# EAGLE board L3DCube_16x16_Base_Rev3 (EAGLE 7.2.0), part 1 of 2
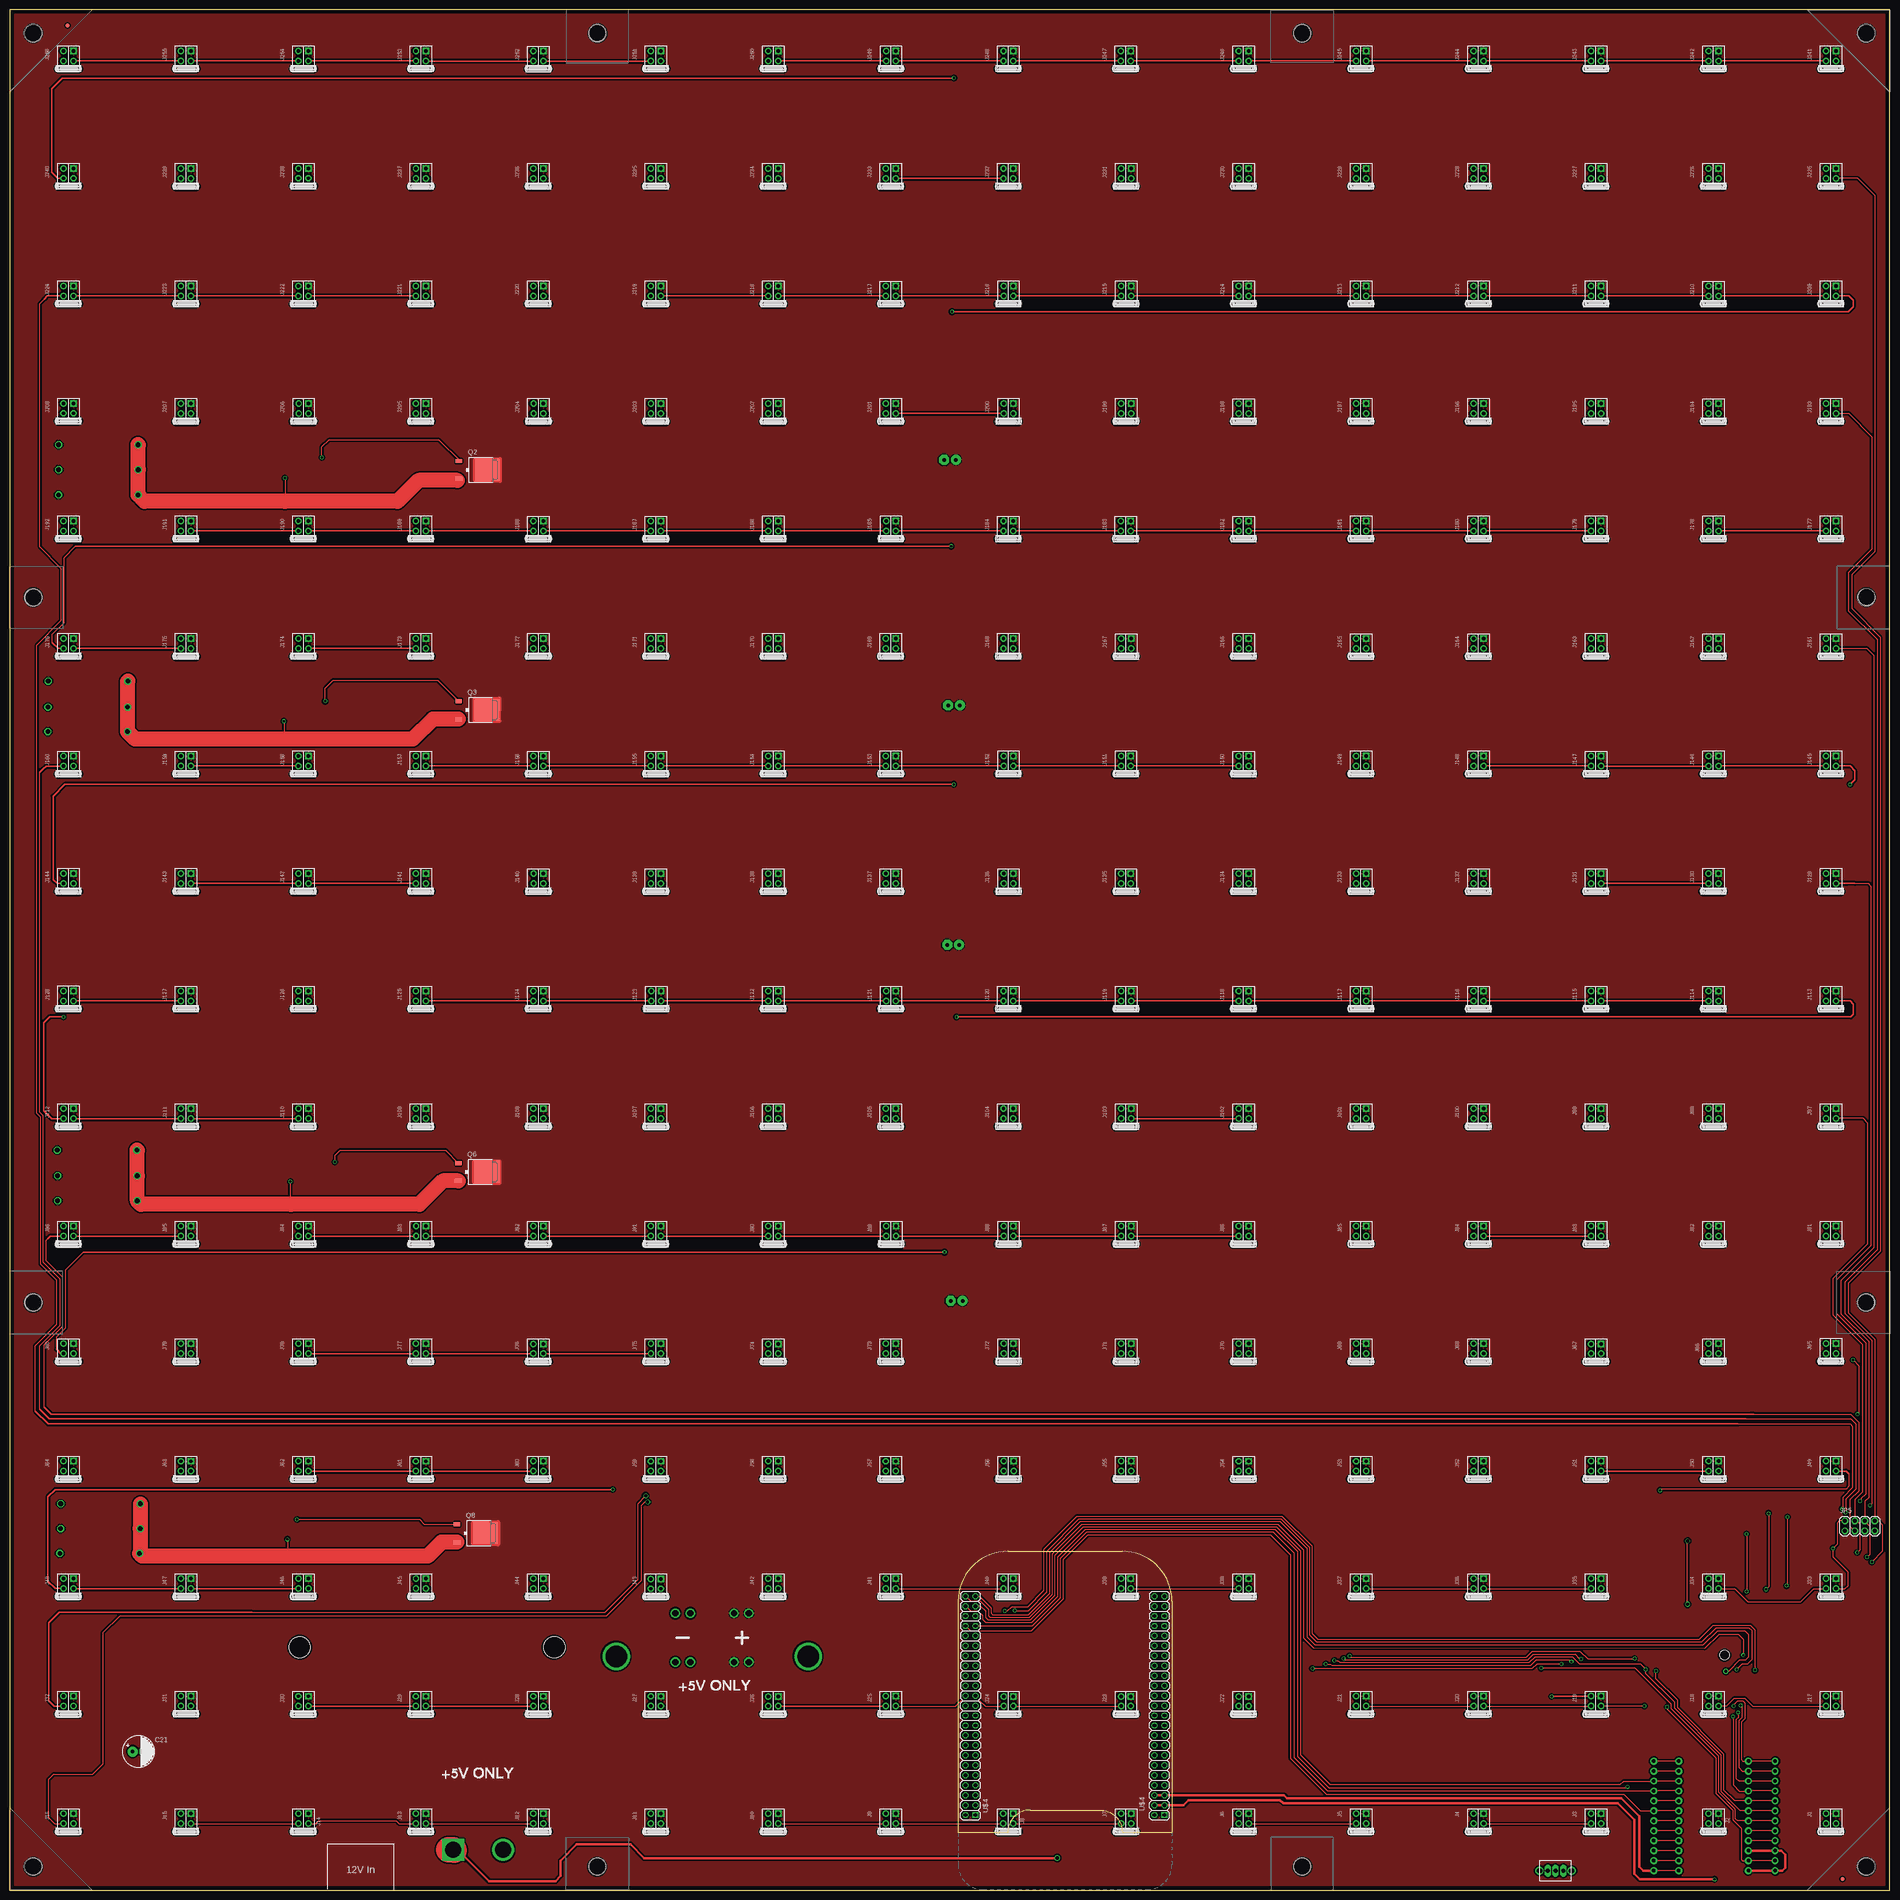
[diagram p0: board, top side]
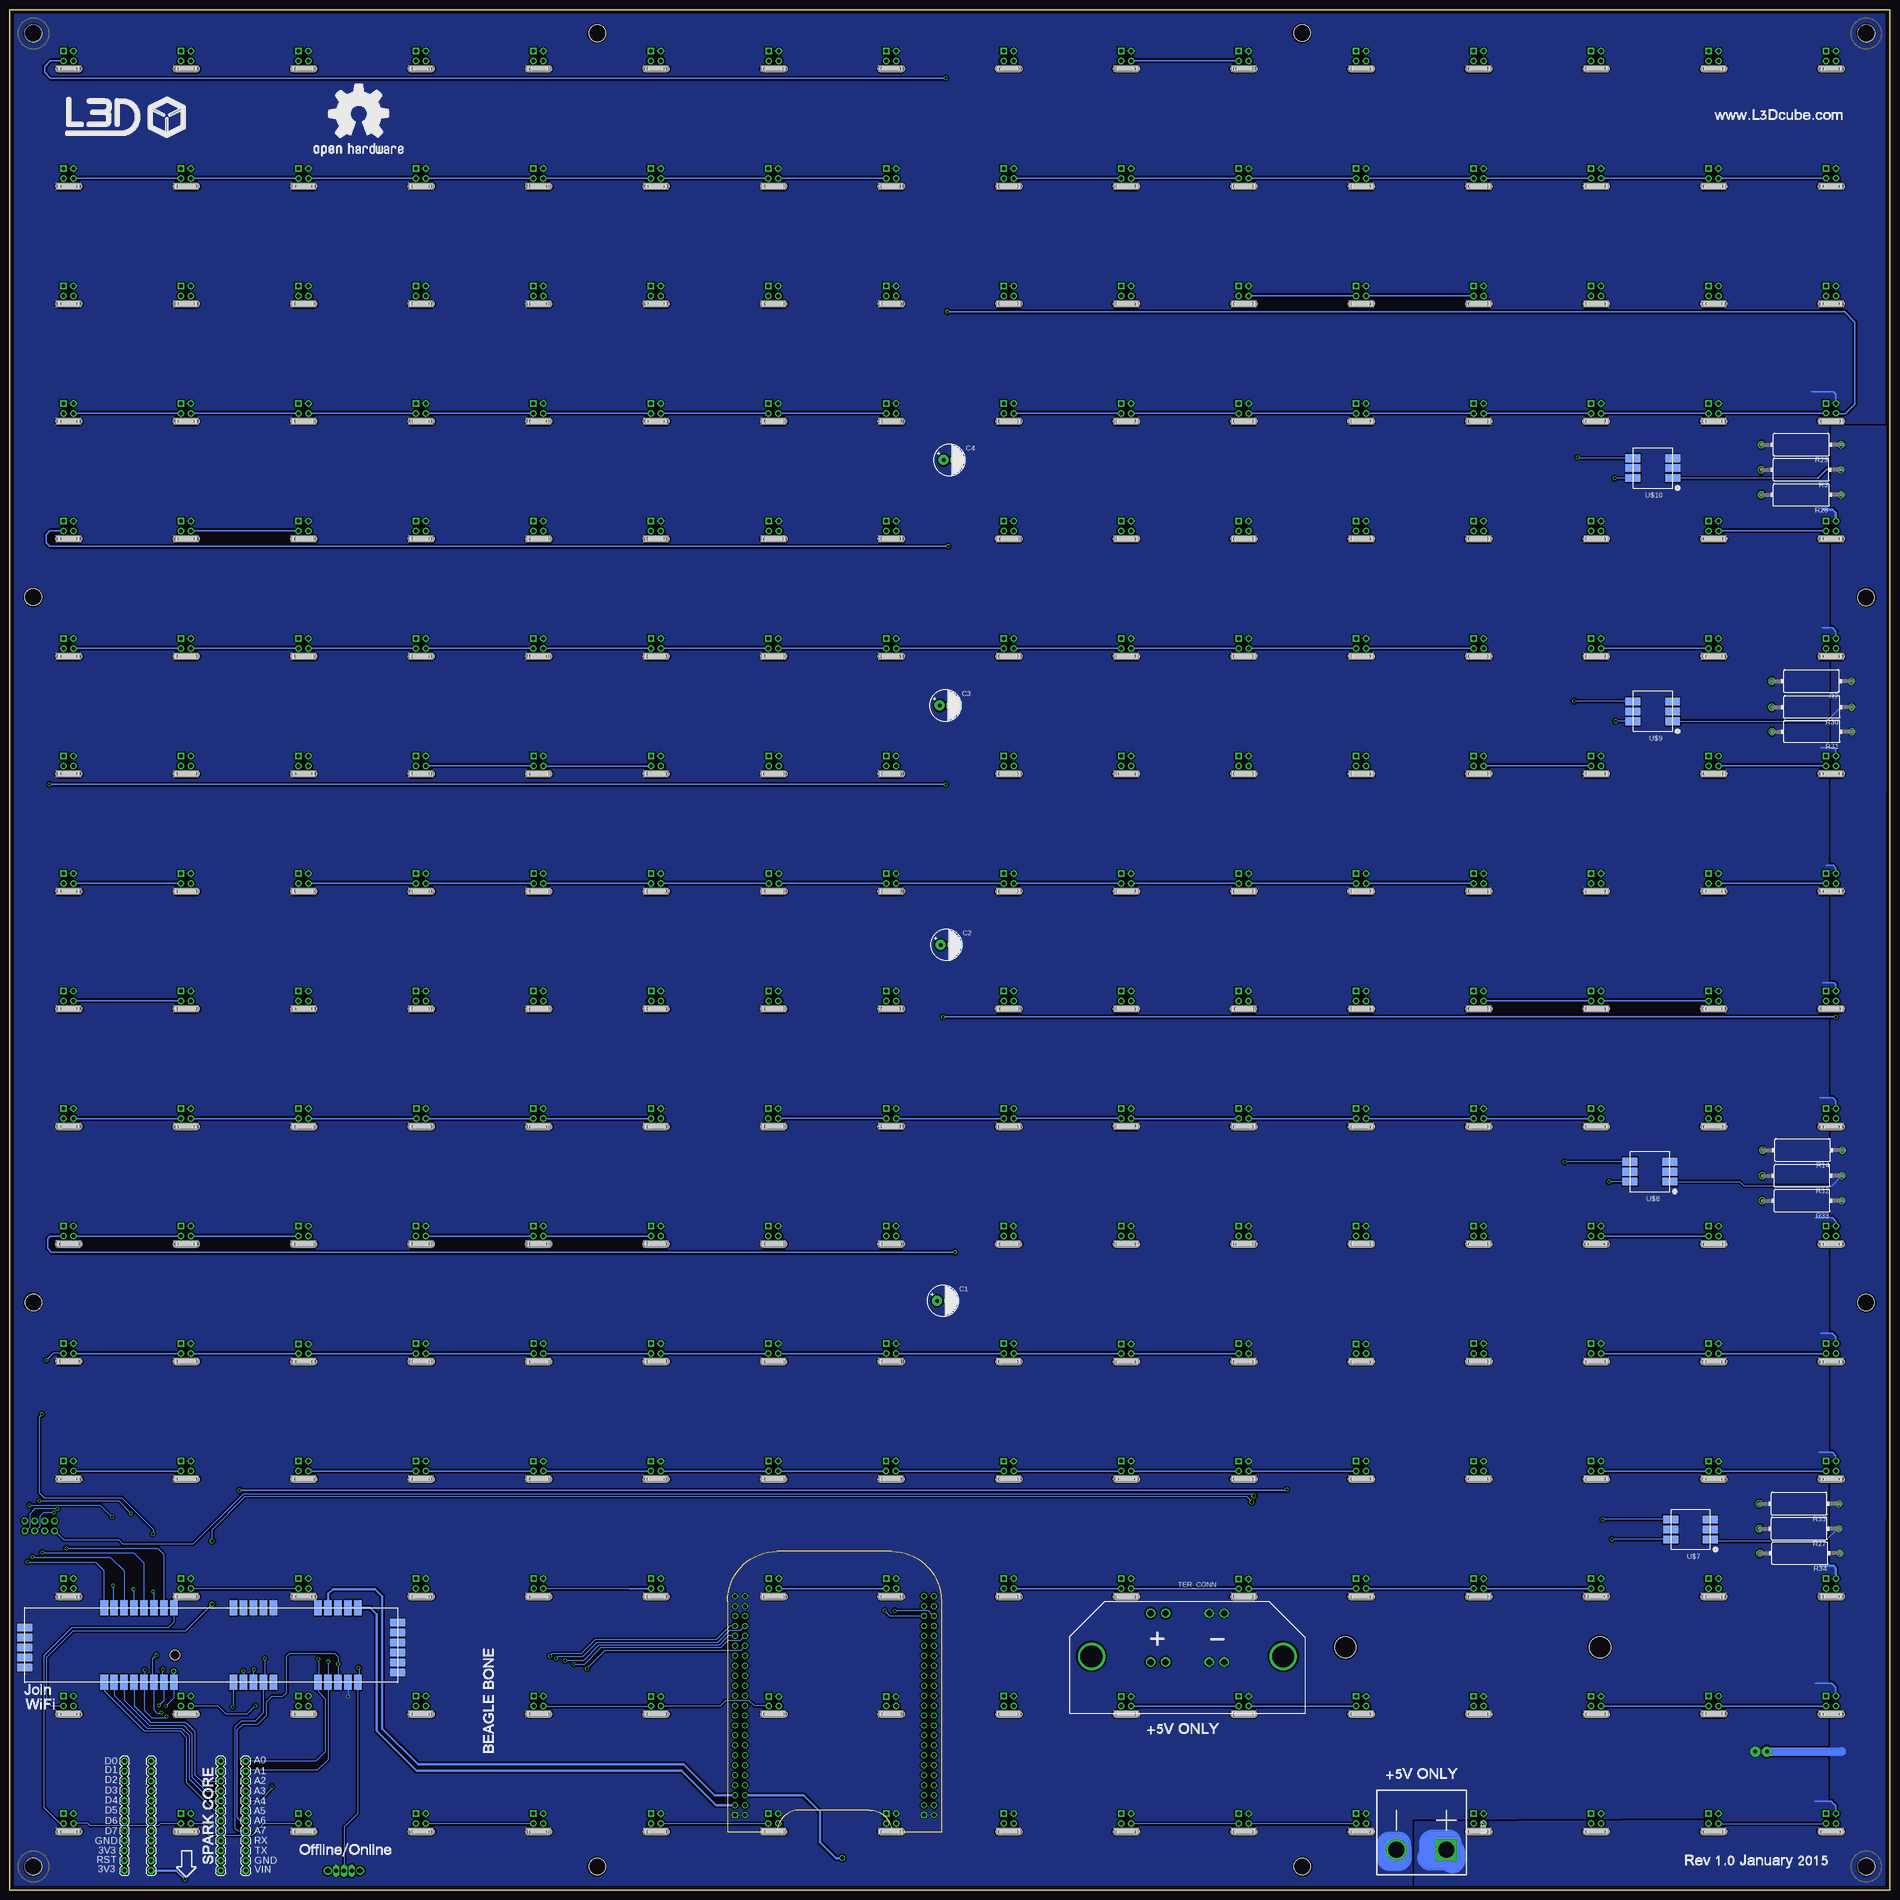
[diagram p1: board, bottom side, seen from below]

Size 480.01 x 479.98 mm. Coordinates in mm from the lower left corner, seen from the top.
Outline: 480.01,479.98 0,479.98 0,0 480.01,0 480.01,479.98
Copper layers (1*16): Top 0.035mm / dielectric 0.5mm / Bottom 0.035mm
Design rules "default *": minimum track width 10mil, minimum drill 15mil, track to track 8mil, track to pad 0mil, pad to pad 0mil, via to via 0mil, smd to smd 8mil, copper to edge 0mil, drill to drill 0mil, minimum pad ring 10mil, minimum via ring 0mil, stop-mask expansion 4mil, vias tented up to drill 0mil, thermal gap 10mil
Holes 4.3 mm at 5.99,474.01 474.01,473.99 474.01,5.99 5.99,5.99 330.02,5.99 150.01,5.99 473.99,150.04 6.05,149.99 6.05,330 150.04,474.04 330.02,473.99 474.04,330.05
Holes 5.5 mm at 74,62 139,62

## Footprints (pad centres in the part's own frame; a part is rotated, then mirrored left to right if it is on the bottom)
CAPACITOR-E3-8 = drill 0.9 pad 2.54: + -1.5,0 | drill 0.9 pad 2.54 octagon: - 1.5,0
2X2P-2.54-REVERSE = drill 0.889 pad 1.651 square: 1 -1.27,-1.27 | drill 0.889 pad 1.651: 2 -1.27,1.27; 3 1.27,1.27; 4 1.27,-1.27 | hole 1.6: -2.2,3.3; -1.9,3.3; -1.6,3.3; -1.3,3.3; -1,3.3; -0.7,3.3; -0.4,3.3; -0.1,3.3; 0.2,3.3; 0.5,3.3; 0.8,3.3; 1.1,3.3; 1.4,3.3; 1.7,3.3; 2,3.3; 2.3,3.3; -2.5,3.3; 2.6,3.3
1X12-SMALL-PADS = drill 0.889 pad 1.753: 1 0,0; 2 2.54,0; 3 5.08,0; 4 7.62,0; 5 10.16,0; 6 12.7,0; 7 15.24,0; 8 17.78,0; 9 20.32,0; 10 22.86,0; 11 25.4,0; 12 27.94,0
2X04 = drill 1.016 pad 1.676 octagon: 1 -3.81,-1.27; 2 -3.81,1.27; 3 -1.27,-1.27; 4 -1.27,1.27; 5 1.27,-1.27; 6 1.27,1.27; 7 3.81,-1.27; 8 3.81,1.27
SWITCH-2P3T-SK12D07VG3 = drill 1.1 pad 1.422 long: 1 -2,0; 2 0,0; 3 2,0 | drill 1.4 pad 1.93: M1 -4.1,0; M2 4.1,0
TO252 = smd 1 x 1.6: 1 -2.28,-4.8; 2 2.28,-4.8 | smd 5.4 x 6.2: 3 0,2.5
RESISTOR-3W-20MM = drill 1.194 octagon: 1 -10.16,0; 2 10.16,0
TERMINALCONNECTOR_15MM = drill 1.6: 1_1 -9.4,0; 1_2 -9.4,12.5; 1_3 -5.6,0; 1_4 -5.6,12.5; 2_1 9.4,0; 2_2 5.6,0; 2_3 9.4,12.5; 2_4 5.6,12.5 | drill 5.5: M1 -24.5,1.5; M2 24.5,1.5
FIDUCIAL-MARK = smd 1 x 1: P$1 0,0
BEAGLEBONE_SHIELD = drill 1 square: 1 4.445,19.05; 47 52.705,19.05 | drill 1: 2 1.905,19.05; 3 4.445,21.59; 4 1.905,21.59; 5 4.445,24.13; 6 1.905,24.13; 7 4.445,26.67; 8 1.905,26.67; 9 4.445,29.21; 10 1.905,29.21; 11 4.445,31.75; 12 1.905,31.75; 13 4.445,34.29; 14 1.905,34.29; 15 4.445,36.83; 16 1.905,36.83; 17 4.445,39.37; 18 1.905,39.37; 19 4.445,41.91; 20 1.905,41.91; 21 4.445,44.45; 22 1.905,44.45; 23 4.445,46.99; 24 1.905,46.99; 25 4.445,49.53; 26 1.905,49.53; 27 4.445,52.07; 28 1.905,52.07; 29 4.445,54.61; 30 1.905,54.61; 31 4.445,57.15; 32 1.905,57.15; 33 4.445,59.69; 34 1.905,59.69; 35 4.445,62.23; 36 1.905,62.23; 37 4.445,64.77; 38 1.905,64.77; 39 4.445,67.31; 40 1.905,67.31; 41 4.445,69.85; 42 1.905,69.85; 43 4.445,72.39; 44 1.905,72.39; 45 4.445,74.93; 46 1.905,74.93; 48 50.165,19.05; 49 52.705,21.59; 50 50.165,21.59; 51 52.705,24.13; 52 50.165,24.13; 53 52.705,26.67; 54 50.165,26.67; 55 52.705,29.21; 56 50.165,29.21; 57 52.705,31.75; 58 50.165,31.75; 59 52.705,34.29; 60 50.165,34.29; 61 52.705,36.83; 62 50.165,36.83; 63 52.705,39.37; 64 50.165,39.37; 65 52.705,41.91; 66 50.165,41.91; 67 52.705,44.45; 68 50.165,44.45; 69 52.705,46.99; 70 50.165,46.99; 71 52.705,49.53; 72 50.165,49.53; 73 52.705,52.07; 74 50.165,52.07; 75 52.705,54.61; 76 50.165,54.61; 77 52.705,57.15; 78 50.165,57.15; 79 52.705,59.69; 80 50.165,59.69; 81 52.705,62.23; 82 50.165,62.23; 83 52.705,64.77; 84 50.165,64.77; 85 52.705,67.31; 86 50.165,67.31; 87 52.705,69.85; 88 50.165,69.85; 89 52.705,72.39; 90 50.165,72.39; 91 52.705,74.93; 92 50.165,74.93
CUBE-16-DAUGHTERBOARD-PAD = smd 1.93 x 3.81: 3V3 -39.37,-8.89; 3V3' -36.83,-8.89; 5V -31.75,-8.89; 5V' -29.21,-8.89; GAIN-CTR -12.7,10.16; IN0 7.62,10.16; IN1 10.16,10.16; IN2 12.7,10.16; IN3 15.24,10.16; IN4 17.78,10.16; IN5 20.32,10.16; IN6 22.86,10.16; IN7 25.4,10.16; MIC -7.62,-8.89; MODE -10.16,10.16; NC -17.78,10.16; OUT0 7.62,-8.89; OUT1 10.16,-8.89; OUT2 12.7,-8.89; OUT3 15.24,-8.89; OUT4 17.78,-8.89; OUT5 20.32,-8.89; OUT6 22.86,-8.89; OUT7 25.4,-8.89; P$8 -36.83,10.16; P$27 -34.29,-8.89; P$30 -17.78,-8.89; P$31 -15.24,-8.89; P$32 -12.7,-8.89; P$33 -10.16,-8.89; RST -7.62,10.16; SOUND -15.24,10.16; STEAMING -39.37,10.16; XOUT -29.21,10.16; YOUT -31.75,10.16; ZOUT -34.29,10.16 | smd 3.81 x 1.93: P$1 -49.53,7.62; P$2 -49.53,5.08; P$3 -49.53,2.54; P$4 -49.53,0; P$5 -49.53,-2.54; P$6 -49.53,-5.08; P$44 45.72,6.35; P$45 45.72,3.81; P$46 45.72,1.27; P$47 45.72,-1.27; P$48 45.72,-3.81 | hole 2.54: 7.315,3.2
1X2P-POWER-PAD = drill 4.1: GND 0,-12.7 | drill 4.1 square: VCC 0,0
CUBE-16-DAUGHTERBOARD-CURRENT-LMT-PAD = smd 3.81 x 1.93: G 5.08,-2.54; GND -5.08,0; GND1 5.08,0; GND2 -5.08,-2.54; V-DROP 5.08,2.54; VCC -5.08,2.54

## Placement (x,y rotation side)
C1  [CAPACITOR-E3-8]  241.76,150.44 0 bottom
C2  [CAPACITOR-E3-8]  240.87,241.3 0 bottom
C3  [CAPACITOR-E3-8]  241.07,302.41 0 bottom
C4  [CAPACITOR-E3-8]  240.08,365.07 0 bottom
C21  [CAPACITOR-E3-8]  32.87,35.38 0 top
GOLD_ORB_SM1  OSHWLOGO_GOLD_ORB_LG  [OSHW0]  403.66,439.14 0 bottom
J1  CONNECTOR-HEADER-2X2P2X2P-2.54-REVERSE  [2X2P-2.54-REVERSE]  465,18.26 180 top
J2  CONNECTOR-HEADER-2X2P2X2P-2.54-REVERSE  [2X2P-2.54-REVERSE]  435.01,18.26 180 top
J3  CONNECTOR-HEADER-2X2P2X2P-2.54-REVERSE  [2X2P-2.54-REVERSE]  404.99,18.24 180 top
J4  CONNECTOR-HEADER-2X2P2X2P-2.54-REVERSE  [2X2P-2.54-REVERSE]  375.01,18.24 180 top
J5  CONNECTOR-HEADER-2X2P2X2P-2.54-REVERSE  [2X2P-2.54-REVERSE]  345.02,18.24 180 top
J6  CONNECTOR-HEADER-2X2P2X2P-2.54-REVERSE  [2X2P-2.54-REVERSE]  315,18.24 180 top
J7  CONNECTOR-HEADER-2X2P2X2P-2.54-REVERSE  [2X2P-2.54-REVERSE]  285.01,18.24 180 top
J8  CONNECTOR-HEADER-2X2P2X2P-2.54-REVERSE  [2X2P-2.54-REVERSE]  254.97,18.24 180 top
J9  CONNECTOR-HEADER-2X2P2X2P-2.54-REVERSE  [2X2P-2.54-REVERSE]  224.98,18.24 180 top
J10  CONNECTOR-HEADER-2X2P2X2P-2.54-REVERSE  [2X2P-2.54-REVERSE]  195,18.24 180 top
J11  CONNECTOR-HEADER-2X2P2X2P-2.54-REVERSE  [2X2P-2.54-REVERSE]  164.98,18.24 180 top
J12  CONNECTOR-HEADER-2X2P2X2P-2.54-REVERSE  [2X2P-2.54-REVERSE]  134.99,18.24 180 top
J13  CONNECTOR-HEADER-2X2P2X2P-2.54-REVERSE  [2X2P-2.54-REVERSE]  105,18.24 180 top
J14  CONNECTOR-HEADER-2X2P2X2P-2.54-REVERSE  [2X2P-2.54-REVERSE]  75.01,18.25 180 top
J15  CONNECTOR-HEADER-2X2P2X2P-2.54-REVERSE  [2X2P-2.54-REVERSE]  45.02,18.25 180 top
J16  CONNECTOR-HEADER-2X2P2X2P-2.54-REVERSE  [2X2P-2.54-REVERSE]  15.03,18.25 180 top
J17  CONNECTOR-HEADER-2X2P2X2P-2.54-REVERSE  [2X2P-2.54-REVERSE]  465,48.24 180 top
J18  CONNECTOR-HEADER-2X2P2X2P-2.54-REVERSE  [2X2P-2.54-REVERSE]  434.98,48.24 180 top
J19  CONNECTOR-HEADER-2X2P2X2P-2.54-REVERSE  [2X2P-2.54-REVERSE]  404.99,48.24 180 top
J20  CONNECTOR-HEADER-2X2P2X2P-2.54-REVERSE  [2X2P-2.54-REVERSE]  375.01,48.24 180 top
J21  CONNECTOR-HEADER-2X2P2X2P-2.54-REVERSE  [2X2P-2.54-REVERSE]  344.99,48.24 180 top
J22  CONNECTOR-HEADER-2X2P2X2P-2.54-REVERSE  [2X2P-2.54-REVERSE]  315,48.22 180 top
J23  CONNECTOR-HEADER-2X2P2X2P-2.54-REVERSE  [2X2P-2.54-REVERSE]  284.99,48.22 180 top
J24  CONNECTOR-HEADER-2X2P2X2P-2.54-REVERSE  [2X2P-2.54-REVERSE]  255,48.22 180 top
J25  CONNECTOR-HEADER-2X2P2X2P-2.54-REVERSE  [2X2P-2.54-REVERSE]  224.98,48.24 180 top
J26  CONNECTOR-HEADER-2X2P2X2P-2.54-REVERSE  [2X2P-2.54-REVERSE]  194.99,48.22 180 top
J27  CONNECTOR-HEADER-2X2P2X2P-2.54-REVERSE  [2X2P-2.54-REVERSE]  165,48.23 180 top
J28  CONNECTOR-HEADER-2X2P2X2P-2.54-REVERSE  [2X2P-2.54-REVERSE]  134.98,48.23 180 top
J29  CONNECTOR-HEADER-2X2P2X2P-2.54-REVERSE  [2X2P-2.54-REVERSE]  104.99,48.23 180 top
J30  CONNECTOR-HEADER-2X2P2X2P-2.54-REVERSE  [2X2P-2.54-REVERSE]  75.01,48.23 180 top
J31  CONNECTOR-HEADER-2X2P2X2P-2.54-REVERSE  [2X2P-2.54-REVERSE]  44.99,48.28 180 top
J32  CONNECTOR-HEADER-2X2P2X2P-2.54-REVERSE  [2X2P-2.54-REVERSE]  15,48.25 180 top
J33  CONNECTOR-HEADER-2X2P2X2P-2.54-REVERSE  [2X2P-2.54-REVERSE]  465,78.25 180 top
J34  CONNECTOR-HEADER-2X2P2X2P-2.54-REVERSE  [2X2P-2.54-REVERSE]  434.98,78.22 180 top
J35  CONNECTOR-HEADER-2X2P2X2P-2.54-REVERSE  [2X2P-2.54-REVERSE]  405.02,78.22 180 top
J36  CONNECTOR-HEADER-2X2P2X2P-2.54-REVERSE  [2X2P-2.54-REVERSE]  375,78.22 180 top
J37  CONNECTOR-HEADER-2X2P2X2P-2.54-REVERSE  [2X2P-2.54-REVERSE]  344.99,78.22 180 top
J38  CONNECTOR-HEADER-2X2P2X2P-2.54-REVERSE  [2X2P-2.54-REVERSE]  315,78.22 180 top
J39  CONNECTOR-HEADER-2X2P2X2P-2.54-REVERSE  [2X2P-2.54-REVERSE]  284.99,78.25 180 top
J40  CONNECTOR-HEADER-2X2P2X2P-2.54-REVERSE  [2X2P-2.54-REVERSE]  254.99,78.23 180 top
J41  CONNECTOR-HEADER-2X2P2X2P-2.54-REVERSE  [2X2P-2.54-REVERSE]  224.98,78.23 180 top
J42  CONNECTOR-HEADER-2X2P2X2P-2.54-REVERSE  [2X2P-2.54-REVERSE]  194.99,78.23 180 top
J43  CONNECTOR-HEADER-2X2P2X2P-2.54-REVERSE  [2X2P-2.54-REVERSE]  165,78.21 180 top
J44  CONNECTOR-HEADER-2X2P2X2P-2.54-REVERSE  [2X2P-2.54-REVERSE]  134.98,78.23 180 top
J45  CONNECTOR-HEADER-2X2P2X2P-2.54-REVERSE  [2X2P-2.54-REVERSE]  105.02,78.23 180 top
J46  CONNECTOR-HEADER-2X2P2X2P-2.54-REVERSE  [2X2P-2.54-REVERSE]  74.98,78.26 180 top
J47  CONNECTOR-HEADER-2X2P2X2P-2.54-REVERSE  [2X2P-2.54-REVERSE]  44.99,78.23 180 top
J48  CONNECTOR-HEADER-2X2P2X2P-2.54-REVERSE  [2X2P-2.54-REVERSE]  15,78.26 180 top
J49  CONNECTOR-HEADER-2X2P2X2P-2.54-REVERSE  [2X2P-2.54-REVERSE]  465,108.23 180 top
J50  CONNECTOR-HEADER-2X2P2X2P-2.54-REVERSE  [2X2P-2.54-REVERSE]  434.98,108.23 180 top
J51  CONNECTOR-HEADER-2X2P2X2P-2.54-REVERSE  [2X2P-2.54-REVERSE]  404.99,108.23 180 top
J52  CONNECTOR-HEADER-2X2P2X2P-2.54-REVERSE  [2X2P-2.54-REVERSE]  375,108.23 180 top
J53  CONNECTOR-HEADER-2X2P2X2P-2.54-REVERSE  [2X2P-2.54-REVERSE]  345.01,108.21 180 top
J54  CONNECTOR-HEADER-2X2P2X2P-2.54-REVERSE  [2X2P-2.54-REVERSE]  315.02,108.21 180 top
J55  CONNECTOR-HEADER-2X2P2X2P-2.54-REVERSE  [2X2P-2.54-REVERSE]  285,108.24 180 top
J56  CONNECTOR-HEADER-2X2P2X2P-2.54-REVERSE  [2X2P-2.54-REVERSE]  255.02,108.24 180 top
J57  CONNECTOR-HEADER-2X2P2X2P-2.54-REVERSE  [2X2P-2.54-REVERSE]  224.98,108.21 180 top
J58  CONNECTOR-HEADER-2X2P2X2P-2.54-REVERSE  [2X2P-2.54-REVERSE]  194.96,108.24 180 top
J59  CONNECTOR-HEADER-2X2P2X2P-2.54-REVERSE  [2X2P-2.54-REVERSE]  165,108.21 180 top
J60  CONNECTOR-HEADER-2X2P2X2P-2.54-REVERSE  [2X2P-2.54-REVERSE]  134.98,108.24 180 top
J61  CONNECTOR-HEADER-2X2P2X2P-2.54-REVERSE  [2X2P-2.54-REVERSE]  104.99,108.21 180 top
J62  CONNECTOR-HEADER-2X2P2X2P-2.54-REVERSE  [2X2P-2.54-REVERSE]  75.01,108.24 180 top
J63  CONNECTOR-HEADER-2X2P2X2P-2.54-REVERSE  [2X2P-2.54-REVERSE]  44.99,108.21 180 top
J64  CONNECTOR-HEADER-2X2P2X2P-2.54-REVERSE  [2X2P-2.54-REVERSE]  15,108.24 180 top
J65  CONNECTOR-HEADER-2X2P2X2P-2.54-REVERSE  [2X2P-2.54-REVERSE]  464.97,138.28 180 top
J66  CONNECTOR-HEADER-2X2P2X2P-2.54-REVERSE  [2X2P-2.54-REVERSE]  434.98,138.25 180 top
J67  CONNECTOR-HEADER-2X2P2X2P-2.54-REVERSE  [2X2P-2.54-REVERSE]  405.02,138.2 180 top
J68  CONNECTOR-HEADER-2X2P2X2P-2.54-REVERSE  [2X2P-2.54-REVERSE]  375.01,138.25 180 top
J69  CONNECTOR-HEADER-2X2P2X2P-2.54-REVERSE  [2X2P-2.54-REVERSE]  344.99,138.23 180 top
J70  CONNECTOR-HEADER-2X2P2X2P-2.54-REVERSE  [2X2P-2.54-REVERSE]  315,138.25 180 top
J71  CONNECTOR-HEADER-2X2P2X2P-2.54-REVERSE  [2X2P-2.54-REVERSE]  285.01,138.23 180 top
J72  CONNECTOR-HEADER-2X2P2X2P-2.54-REVERSE  [2X2P-2.54-REVERSE]  255,138.25 180 top
J73  CONNECTOR-HEADER-2X2P2X2P-2.54-REVERSE  [2X2P-2.54-REVERSE]  224.98,138.23 180 top
J74  CONNECTOR-HEADER-2X2P2X2P-2.54-REVERSE  [2X2P-2.54-REVERSE]  195,138.2 180 top
J75  CONNECTOR-HEADER-2X2P2X2P-2.54-REVERSE  [2X2P-2.54-REVERSE]  165.01,138.23 180 top
J76  CONNECTOR-HEADER-2X2P2X2P-2.54-REVERSE  [2X2P-2.54-REVERSE]  134.99,138.2 180 top
J77  CONNECTOR-HEADER-2X2P2X2P-2.54-REVERSE  [2X2P-2.54-REVERSE]  105,138.25 180 top
J78  CONNECTOR-HEADER-2X2P2X2P-2.54-REVERSE  [2X2P-2.54-REVERSE]  75.01,138.21 180 top
J79  CONNECTOR-HEADER-2X2P2X2P-2.54-REVERSE  [2X2P-2.54-REVERSE]  44.99,138.24 180 top
J80  CONNECTOR-HEADER-2X2P2X2P-2.54-REVERSE  [2X2P-2.54-REVERSE]  15,138.24 180 top
J81  CONNECTOR-HEADER-2X2P2X2P-2.54-REVERSE  [2X2P-2.54-REVERSE]  464.97,168.23 180 top
J82  CONNECTOR-HEADER-2X2P2X2P-2.54-REVERSE  [2X2P-2.54-REVERSE]  435.01,168.23 180 top
J83  CONNECTOR-HEADER-2X2P2X2P-2.54-REVERSE  [2X2P-2.54-REVERSE]  404.99,168.21 180 top
J84  CONNECTOR-HEADER-2X2P2X2P-2.54-REVERSE  [2X2P-2.54-REVERSE]  375.01,168.23 180 top
J85  CONNECTOR-HEADER-2X2P2X2P-2.54-REVERSE  [2X2P-2.54-REVERSE]  345.02,168.23 180 top
J86  CONNECTOR-HEADER-2X2P2X2P-2.54-REVERSE  [2X2P-2.54-REVERSE]  315,168.23 180 top
J87  CONNECTOR-HEADER-2X2P2X2P-2.54-REVERSE  [2X2P-2.54-REVERSE]  285.01,168.23 180 top
J88  CONNECTOR-HEADER-2X2P2X2P-2.54-REVERSE  [2X2P-2.54-REVERSE]  255,168.23 180 top
J89  CONNECTOR-HEADER-2X2P2X2P-2.54-REVERSE  [2X2P-2.54-REVERSE]  225.01,168.21 180 top
J90  CONNECTOR-HEADER-2X2P2X2P-2.54-REVERSE  [2X2P-2.54-REVERSE]  194.99,168.21 180 top
J91  CONNECTOR-HEADER-2X2P2X2P-2.54-REVERSE  [2X2P-2.54-REVERSE]  164.97,168.22 180 top
J92  CONNECTOR-HEADER-2X2P2X2P-2.54-REVERSE  [2X2P-2.54-REVERSE]  135.01,168.24 180 top
J93  CONNECTOR-HEADER-2X2P2X2P-2.54-REVERSE  [2X2P-2.54-REVERSE]  105.02,168.22 180 top
J94  CONNECTOR-HEADER-2X2P2X2P-2.54-REVERSE  [2X2P-2.54-REVERSE]  74.98,168.22 180 top
J95  CONNECTOR-HEADER-2X2P2X2P-2.54-REVERSE  [2X2P-2.54-REVERSE]  45.02,168.22 180 top
J96  CONNECTOR-HEADER-2X2P2X2P-2.54-REVERSE  [2X2P-2.54-REVERSE]  15,168.22 180 top
J97  CONNECTOR-HEADER-2X2P2X2P-2.54-REVERSE  [2X2P-2.54-REVERSE]  465,198.24 180 top
J98  CONNECTOR-HEADER-2X2P2X2P-2.54-REVERSE  [2X2P-2.54-REVERSE]  435.01,198.21 180 top
J99  CONNECTOR-HEADER-2X2P2X2P-2.54-REVERSE  [2X2P-2.54-REVERSE]  404.99,198.21 180 top
J100  CONNECTOR-HEADER-2X2P2X2P-2.54-REVERSE  [2X2P-2.54-REVERSE]  374.98,198.24 180 top
J101  CONNECTOR-HEADER-2X2P2X2P-2.54-REVERSE  [2X2P-2.54-REVERSE]  345.02,198.21 180 top
J102  CONNECTOR-HEADER-2X2P2X2P-2.54-REVERSE  [2X2P-2.54-REVERSE]  315,198.21 180 top
J103  CONNECTOR-HEADER-2X2P2X2P-2.54-REVERSE  [2X2P-2.54-REVERSE]  285.01,198.24 180 top
J104  CONNECTOR-HEADER-2X2P2X2P-2.54-REVERSE  [2X2P-2.54-REVERSE]  254.99,198.25 180 top
J105  CONNECTOR-HEADER-2X2P2X2P-2.54-REVERSE  [2X2P-2.54-REVERSE]  224.98,198.22 180 top
J106  CONNECTOR-HEADER-2X2P2X2P-2.54-REVERSE  [2X2P-2.54-REVERSE]  194.99,198.25 180 top
J107  CONNECTOR-HEADER-2X2P2X2P-2.54-REVERSE  [2X2P-2.54-REVERSE]  165,198.22 180 top
J108  CONNECTOR-HEADER-2X2P2X2P-2.54-REVERSE  [2X2P-2.54-REVERSE]  135.01,198.22 180 top
J109  CONNECTOR-HEADER-2X2P2X2P-2.54-REVERSE  [2X2P-2.54-REVERSE]  104.99,198.22 180 top
J110  CONNECTOR-HEADER-2X2P2X2P-2.54-REVERSE  [2X2P-2.54-REVERSE]  75.01,198.22 180 top
J111  CONNECTOR-HEADER-2X2P2X2P-2.54-REVERSE  [2X2P-2.54-REVERSE]  45.02,198.22 180 top
J112  CONNECTOR-HEADER-2X2P2X2P-2.54-REVERSE  [2X2P-2.54-REVERSE]  15,198.22 180 top
J113  CONNECTOR-HEADER-2X2P2X2P-2.54-REVERSE  [2X2P-2.54-REVERSE]  465,228.25 180 top
J114  CONNECTOR-HEADER-2X2P2X2P-2.54-REVERSE  [2X2P-2.54-REVERSE]  434.98,228.25 180 top
J115  CONNECTOR-HEADER-2X2P2X2P-2.54-REVERSE  [2X2P-2.54-REVERSE]  405.02,228.25 180 top
J116  CONNECTOR-HEADER-2X2P2X2P-2.54-REVERSE  [2X2P-2.54-REVERSE]  375,228.25 180 top
J117  CONNECTOR-HEADER-2X2P2X2P-2.54-REVERSE  [2X2P-2.54-REVERSE]  345.01,228.25 180 top
J118  CONNECTOR-HEADER-2X2P2X2P-2.54-REVERSE  [2X2P-2.54-REVERSE]  314.99,228.25 180 top
J119  CONNECTOR-HEADER-2X2P2X2P-2.54-REVERSE  [2X2P-2.54-REVERSE]  285,228.25 180 top
J120  CONNECTOR-HEADER-2X2P2X2P-2.54-REVERSE  [2X2P-2.54-REVERSE]  254.99,228.25 180 top
J121  CONNECTOR-HEADER-2X2P2X2P-2.54-REVERSE  [2X2P-2.54-REVERSE]  225,228.25 180 top
J122  CONNECTOR-HEADER-2X2P2X2P-2.54-REVERSE  [2X2P-2.54-REVERSE]  194.99,228.25 180 top
J123  CONNECTOR-HEADER-2X2P2X2P-2.54-REVERSE  [2X2P-2.54-REVERSE]  165.02,228.25 180 top
J124  CONNECTOR-HEADER-2X2P2X2P-2.54-REVERSE  [2X2P-2.54-REVERSE]  134.98,228.25 180 top
J125  CONNECTOR-HEADER-2X2P2X2P-2.54-REVERSE  [2X2P-2.54-REVERSE]  104.99,228.25 180 top
J126  CONNECTOR-HEADER-2X2P2X2P-2.54-REVERSE  [2X2P-2.54-REVERSE]  75.01,228.25 180 top
J127  CONNECTOR-HEADER-2X2P2X2P-2.54-REVERSE  [2X2P-2.54-REVERSE]  44.99,228.25 180 top
J128  CONNECTOR-HEADER-2X2P2X2P-2.54-REVERSE  [2X2P-2.54-REVERSE]  15.03,228.28 180 top
J129  CONNECTOR-HEADER-2X2P2X2P-2.54-REVERSE  [2X2P-2.54-REVERSE]  465,258.27 180 top
J130  CONNECTOR-HEADER-2X2P2X2P-2.54-REVERSE  [2X2P-2.54-REVERSE]  434.98,258.27 180 top
J131  CONNECTOR-HEADER-2X2P2X2P-2.54-REVERSE  [2X2P-2.54-REVERSE]  404.99,258.24 180 top
J132  CONNECTOR-HEADER-2X2P2X2P-2.54-REVERSE  [2X2P-2.54-REVERSE]  375.01,258.24 180 top
J133  CONNECTOR-HEADER-2X2P2X2P-2.54-REVERSE  [2X2P-2.54-REVERSE]  344.99,258.24 180 top
J134  CONNECTOR-HEADER-2X2P2X2P-2.54-REVERSE  [2X2P-2.54-REVERSE]  315,258.24 180 top
J135  CONNECTOR-HEADER-2X2P2X2P-2.54-REVERSE  [2X2P-2.54-REVERSE]  284.99,258.24 180 top
J136  CONNECTOR-HEADER-2X2P2X2P-2.54-REVERSE  [2X2P-2.54-REVERSE]  255,258.24 180 top
J137  CONNECTOR-HEADER-2X2P2X2P-2.54-REVERSE  [2X2P-2.54-REVERSE]  224.98,258.24 180 top
J138  CONNECTOR-HEADER-2X2P2X2P-2.54-REVERSE  [2X2P-2.54-REVERSE]  195,258.24 180 top
J139  CONNECTOR-HEADER-2X2P2X2P-2.54-REVERSE  [2X2P-2.54-REVERSE]  165.01,258.24 180 top
J140  CONNECTOR-HEADER-2X2P2X2P-2.54-REVERSE  [2X2P-2.54-REVERSE]  135.02,258.24 180 top
J141  CONNECTOR-HEADER-2X2P2X2P-2.54-REVERSE  [2X2P-2.54-REVERSE]  105,258.27 180 top
J142  CONNECTOR-HEADER-2X2P2X2P-2.54-REVERSE  [2X2P-2.54-REVERSE]  75.01,258.25 180 top
J143  CONNECTOR-HEADER-2X2P2X2P-2.54-REVERSE  [2X2P-2.54-REVERSE]  44.99,258.25 180 top
J144  CONNECTOR-HEADER-2X2P2X2P-2.54-REVERSE  [2X2P-2.54-REVERSE]  15,258.25 180 top
J145  CONNECTOR-HEADER-2X2P2X2P-2.54-REVERSE  [2X2P-2.54-REVERSE]  465,288.25 180 top
J146  CONNECTOR-HEADER-2X2P2X2P-2.54-REVERSE  [2X2P-2.54-REVERSE]  434.98,288.25 180 top
J147  CONNECTOR-HEADER-2X2P2X2P-2.54-REVERSE  [2X2P-2.54-REVERSE]  405.02,288.22 180 top
J148  CONNECTOR-HEADER-2X2P2X2P-2.54-REVERSE  [2X2P-2.54-REVERSE]  375.01,288.25 180 top
J149  CONNECTOR-HEADER-2X2P2X2P-2.54-REVERSE  [2X2P-2.54-REVERSE]  344.99,288.25 180 top
J150  CONNECTOR-HEADER-2X2P2X2P-2.54-REVERSE  [2X2P-2.54-REVERSE]  315,288.22 180 top
J151  CONNECTOR-HEADER-2X2P2X2P-2.54-REVERSE  [2X2P-2.54-REVERSE]  284.99,288.25 180 top
J152  CONNECTOR-HEADER-2X2P2X2P-2.54-REVERSE  [2X2P-2.54-REVERSE]  255,288.25 180 top
J153  CONNECTOR-HEADER-2X2P2X2P-2.54-REVERSE  [2X2P-2.54-REVERSE]  224.98,288.25 180 top
J154  CONNECTOR-HEADER-2X2P2X2P-2.54-REVERSE  [2X2P-2.54-REVERSE]  194.97,288.25 180 top
J155  CONNECTOR-HEADER-2X2P2X2P-2.54-REVERSE  [2X2P-2.54-REVERSE]  165,288.23 180 top
J156  CONNECTOR-HEADER-2X2P2X2P-2.54-REVERSE  [2X2P-2.54-REVERSE]  135.01,288.23 180 top
J157  CONNECTOR-HEADER-2X2P2X2P-2.54-REVERSE  [2X2P-2.54-REVERSE]  104.99,288.23 180 top
J158  CONNECTOR-HEADER-2X2P2X2P-2.54-REVERSE  [2X2P-2.54-REVERSE]  75.01,288.26 180 top
J159  CONNECTOR-HEADER-2X2P2X2P-2.54-REVERSE  [2X2P-2.54-REVERSE]  45.02,288.23 180 top
J160  CONNECTOR-HEADER-2X2P2X2P-2.54-REVERSE  [2X2P-2.54-REVERSE]  15,288.23 180 top
J161  CONNECTOR-HEADER-2X2P2X2P-2.54-REVERSE  [2X2P-2.54-REVERSE]  465,318.23 180 top
J162  CONNECTOR-HEADER-2X2P2X2P-2.54-REVERSE  [2X2P-2.54-REVERSE]  434.98,318.23 180 top
J163  CONNECTOR-HEADER-2X2P2X2P-2.54-REVERSE  [2X2P-2.54-REVERSE]  404.99,318.25 180 top
J164  CONNECTOR-HEADER-2X2P2X2P-2.54-REVERSE  [2X2P-2.54-REVERSE]  375,318.23 180 top
J165  CONNECTOR-HEADER-2X2P2X2P-2.54-REVERSE  [2X2P-2.54-REVERSE]  345.02,318.23 180 top
J166  CONNECTOR-HEADER-2X2P2X2P-2.54-REVERSE  [2X2P-2.54-REVERSE]  315,318.25 180 top
J167  CONNECTOR-HEADER-2X2P2X2P-2.54-REVERSE  [2X2P-2.54-REVERSE]  285.01,318.23 180 top
J168  CONNECTOR-HEADER-2X2P2X2P-2.54-REVERSE  [2X2P-2.54-REVERSE]  254.99,318.24 180 top
J169  CONNECTOR-HEADER-2X2P2X2P-2.54-REVERSE  [2X2P-2.54-REVERSE]  224.98,318.24 180 top
J170  CONNECTOR-HEADER-2X2P2X2P-2.54-REVERSE  [2X2P-2.54-REVERSE]  194.99,318.24 180 top
J171  CONNECTOR-HEADER-2X2P2X2P-2.54-REVERSE  [2X2P-2.54-REVERSE]  165,318.26 180 top
J172  CONNECTOR-HEADER-2X2P2X2P-2.54-REVERSE  [2X2P-2.54-REVERSE]  135.01,318.26 180 top
J173  CONNECTOR-HEADER-2X2P2X2P-2.54-REVERSE  [2X2P-2.54-REVERSE]  104.99,318.24 180 top
J174  CONNECTOR-HEADER-2X2P2X2P-2.54-REVERSE  [2X2P-2.54-REVERSE]  75.01,318.24 180 top
J175  CONNECTOR-HEADER-2X2P2X2P-2.54-REVERSE  [2X2P-2.54-REVERSE]  44.99,318.24 180 top
J176  CONNECTOR-HEADER-2X2P2X2P-2.54-REVERSE  [2X2P-2.54-REVERSE]  15,318.24 180 top
J177  CONNECTOR-HEADER-2X2P2X2P-2.54-REVERSE  [2X2P-2.54-REVERSE]  465,348.26 180 top
J178  CONNECTOR-HEADER-2X2P2X2P-2.54-REVERSE  [2X2P-2.54-REVERSE]  435.01,348.24 180 top
J179  CONNECTOR-HEADER-2X2P2X2P-2.54-REVERSE  [2X2P-2.54-REVERSE]  404.99,348.24 180 top
J180  CONNECTOR-HEADER-2X2P2X2P-2.54-REVERSE  [2X2P-2.54-REVERSE]  375,348.24 180 top
J181  CONNECTOR-HEADER-2X2P2X2P-2.54-REVERSE  [2X2P-2.54-REVERSE]  345.01,348.24 180 top
J182  CONNECTOR-HEADER-2X2P2X2P-2.54-REVERSE  [2X2P-2.54-REVERSE]  315.02,348.22 180 top
J183  CONNECTOR-HEADER-2X2P2X2P-2.54-REVERSE  [2X2P-2.54-REVERSE]  284.98,348.22 180 top
J184  CONNECTOR-HEADER-2X2P2X2P-2.54-REVERSE  [2X2P-2.54-REVERSE]  254.99,348.22 180 top
J185  CONNECTOR-HEADER-2X2P2X2P-2.54-REVERSE  [2X2P-2.54-REVERSE]  225,348.24 180 top
J186  CONNECTOR-HEADER-2X2P2X2P-2.54-REVERSE  [2X2P-2.54-REVERSE]  194.99,348.24 180 top
J187  CONNECTOR-HEADER-2X2P2X2P-2.54-REVERSE  [2X2P-2.54-REVERSE]  165,348.22 180 top
J188  CONNECTOR-HEADER-2X2P2X2P-2.54-REVERSE  [2X2P-2.54-REVERSE]  135.01,348.22 180 top
J189  CONNECTOR-HEADER-2X2P2X2P-2.54-REVERSE  [2X2P-2.54-REVERSE]  104.99,348.24 180 top
J190  CONNECTOR-HEADER-2X2P2X2P-2.54-REVERSE  [2X2P-2.54-REVERSE]  75.01,348.24 180 top
J191  CONNECTOR-HEADER-2X2P2X2P-2.54-REVERSE  [2X2P-2.54-REVERSE]  45.02,348.24 180 top
J192  CONNECTOR-HEADER-2X2P2X2P-2.54-REVERSE  [2X2P-2.54-REVERSE]  15,348.24 180 top
J193  CONNECTOR-HEADER-2X2P2X2P-2.54-REVERSE  [2X2P-2.54-REVERSE]  465,378.23 180 top
J194  CONNECTOR-HEADER-2X2P2X2P-2.54-REVERSE  [2X2P-2.54-REVERSE]  435.01,378.21 180 top
J195  CONNECTOR-HEADER-2X2P2X2P-2.54-REVERSE  [2X2P-2.54-REVERSE]  404.99,378.26 180 top
J196  CONNECTOR-HEADER-2X2P2X2P-2.54-REVERSE  [2X2P-2.54-REVERSE]  375.01,378.23 180 top
J197  CONNECTOR-HEADER-2X2P2X2P-2.54-REVERSE  [2X2P-2.54-REVERSE]  345.02,378.23 180 top
J198  CONNECTOR-HEADER-2X2P2X2P-2.54-REVERSE  [2X2P-2.54-REVERSE]  315.03,378.21 180 top
J199  CONNECTOR-HEADER-2X2P2X2P-2.54-REVERSE  [2X2P-2.54-REVERSE]  285.01,378.23 180 top
J200  CONNECTOR-HEADER-2X2P2X2P-2.54-REVERSE  [2X2P-2.54-REVERSE]  255,378.23 180 top
J201  CONNECTOR-HEADER-2X2P2X2P-2.54-REVERSE  [2X2P-2.54-REVERSE]  224.98,378.23 180 top
J202  CONNECTOR-HEADER-2X2P2X2P-2.54-REVERSE  [2X2P-2.54-REVERSE]  195,378.23 180 top
J203  CONNECTOR-HEADER-2X2P2X2P-2.54-REVERSE  [2X2P-2.54-REVERSE]  165.01,378.23 180 top
J204  CONNECTOR-HEADER-2X2P2X2P-2.54-REVERSE  [2X2P-2.54-REVERSE]  135.02,378.23 180 top
J205  CONNECTOR-HEADER-2X2P2X2P-2.54-REVERSE  [2X2P-2.54-REVERSE]  105,378.23 180 top
J206  CONNECTOR-HEADER-2X2P2X2P-2.54-REVERSE  [2X2P-2.54-REVERSE]  75.03,378.24 180 top
J207  CONNECTOR-HEADER-2X2P2X2P-2.54-REVERSE  [2X2P-2.54-REVERSE]  44.99,378.24 180 top
J208  CONNECTOR-HEADER-2X2P2X2P-2.54-REVERSE  [2X2P-2.54-REVERSE]  15.03,378.27 180 top
J209  CONNECTOR-HEADER-2X2P2X2P-2.54-REVERSE  [2X2P-2.54-REVERSE]  465,408.24 180 top
J210  CONNECTOR-HEADER-2X2P2X2P-2.54-REVERSE  [2X2P-2.54-REVERSE]  435.01,408.21 180 top
J211  CONNECTOR-HEADER-2X2P2X2P-2.54-REVERSE  [2X2P-2.54-REVERSE]  404.99,408.24 180 top
J212  CONNECTOR-HEADER-2X2P2X2P-2.54-REVERSE  [2X2P-2.54-REVERSE]  375.01,408.24 180 top
J213  CONNECTOR-HEADER-2X2P2X2P-2.54-REVERSE  [2X2P-2.54-REVERSE]  345.02,408.24 180 top
J214  CONNECTOR-HEADER-2X2P2X2P-2.54-REVERSE  [2X2P-2.54-REVERSE]  315.03,408.24 180 top
J215  CONNECTOR-HEADER-2X2P2X2P-2.54-REVERSE  [2X2P-2.54-REVERSE]  285.01,408.24 180 top
J216  CONNECTOR-HEADER-2X2P2X2P-2.54-REVERSE  [2X2P-2.54-REVERSE]  255,408.24 180 top
J217  CONNECTOR-HEADER-2X2P2X2P-2.54-REVERSE  [2X2P-2.54-REVERSE]  224.98,408.21 180 top
J218  CONNECTOR-HEADER-2X2P2X2P-2.54-REVERSE  [2X2P-2.54-REVERSE]  194.99,408.24 180 top
J219  CONNECTOR-HEADER-2X2P2X2P-2.54-REVERSE  [2X2P-2.54-REVERSE]  165,408.22 180 top
J220  CONNECTOR-HEADER-2X2P2X2P-2.54-REVERSE  [2X2P-2.54-REVERSE]  134.98,408.22 180 top
J221  CONNECTOR-HEADER-2X2P2X2P-2.54-REVERSE  [2X2P-2.54-REVERSE]  104.99,408.22 180 top
J222  CONNECTOR-HEADER-2X2P2X2P-2.54-REVERSE  [2X2P-2.54-REVERSE]  75.01,408.22 180 top
J223  CONNECTOR-HEADER-2X2P2X2P-2.54-REVERSE  [2X2P-2.54-REVERSE]  44.99,408.25 180 top
J224  CONNECTOR-HEADER-2X2P2X2P-2.54-REVERSE  [2X2P-2.54-REVERSE]  15,408.25 180 top
J225  CONNECTOR-HEADER-2X2P2X2P-2.54-REVERSE  [2X2P-2.54-REVERSE]  465,438.22 180 top
J226  CONNECTOR-HEADER-2X2P2X2P-2.54-REVERSE  [2X2P-2.54-REVERSE]  434.98,438.22 180 top
J227  CONNECTOR-HEADER-2X2P2X2P-2.54-REVERSE  [2X2P-2.54-REVERSE]  405.02,438.22 180 top
J228  CONNECTOR-HEADER-2X2P2X2P-2.54-REVERSE  [2X2P-2.54-REVERSE]  375,438.24 180 top
J229  CONNECTOR-HEADER-2X2P2X2P-2.54-REVERSE  [2X2P-2.54-REVERSE]  345.02,438.22 180 top
J230  CONNECTOR-HEADER-2X2P2X2P-2.54-REVERSE  [2X2P-2.54-REVERSE]  315.03,438.22 180 top
J231  CONNECTOR-HEADER-2X2P2X2P-2.54-REVERSE  [2X2P-2.54-REVERSE]  285.01,438.22 180 top
J232  CONNECTOR-HEADER-2X2P2X2P-2.54-REVERSE  [2X2P-2.54-REVERSE]  254.99,438.23 180 top
J233  CONNECTOR-HEADER-2X2P2X2P-2.54-REVERSE  [2X2P-2.54-REVERSE]  224.98,438.23 180 top
J234  CONNECTOR-HEADER-2X2P2X2P-2.54-REVERSE  [2X2P-2.54-REVERSE]  194.99,438.23 180 top
J235  CONNECTOR-HEADER-2X2P2X2P-2.54-REVERSE  [2X2P-2.54-REVERSE]  165,438.25 180 top
J236  CONNECTOR-HEADER-2X2P2X2P-2.54-REVERSE  [2X2P-2.54-REVERSE]  134.98,438.23 180 top
J237  CONNECTOR-HEADER-2X2P2X2P-2.54-REVERSE  [2X2P-2.54-REVERSE]  105.02,438.23 180 top
J238  CONNECTOR-HEADER-2X2P2X2P-2.54-REVERSE  [2X2P-2.54-REVERSE]  75.01,438.25 180 top
J239  CONNECTOR-HEADER-2X2P2X2P-2.54-REVERSE  [2X2P-2.54-REVERSE]  45.02,438.23 180 top
J240  CONNECTOR-HEADER-2X2P2X2P-2.54-REVERSE  [2X2P-2.54-REVERSE]  15,438.25 180 top
J241  CONNECTOR-HEADER-2X2P2X2P-2.54-REVERSE  [2X2P-2.54-REVERSE]  465,468.22 180 top
J242  CONNECTOR-HEADER-2X2P2X2P-2.54-REVERSE  [2X2P-2.54-REVERSE]  435.01,468.22 180 top
J243  CONNECTOR-HEADER-2X2P2X2P-2.54-REVERSE  [2X2P-2.54-REVERSE]  404.99,468.22 180 top
J244  CONNECTOR-HEADER-2X2P2X2P-2.54-REVERSE  [2X2P-2.54-REVERSE]  375,468.22 180 top
J245  CONNECTOR-HEADER-2X2P2X2P-2.54-REVERSE  [2X2P-2.54-REVERSE]  345.01,468.23 180 top
J246  CONNECTOR-HEADER-2X2P2X2P-2.54-REVERSE  [2X2P-2.54-REVERSE]  315.02,468.23 180 top
J247  CONNECTOR-HEADER-2X2P2X2P-2.54-REVERSE  [2X2P-2.54-REVERSE]  284.98,468.23 180 top
J248  CONNECTOR-HEADER-2X2P2X2P-2.54-REVERSE  [2X2P-2.54-REVERSE]  254.99,468.21 180 top
J249  CONNECTOR-HEADER-2X2P2X2P-2.54-REVERSE  [2X2P-2.54-REVERSE]  225,468.23 180 top
J250  CONNECTOR-HEADER-2X2P2X2P-2.54-REVERSE  [2X2P-2.54-REVERSE]  194.99,468.23 180 top
J251  CONNECTOR-HEADER-2X2P2X2P-2.54-REVERSE  [2X2P-2.54-REVERSE]  164.97,468.23 180 top
J252  CONNECTOR-HEADER-2X2P2X2P-2.54-REVERSE  [2X2P-2.54-REVERSE]  135.01,468.18 180 top
J253  CONNECTOR-HEADER-2X2P2X2P-2.54-REVERSE  [2X2P-2.54-REVERSE]  105.02,468.21 180 top
J254  CONNECTOR-HEADER-2X2P2X2P-2.54-REVERSE  [2X2P-2.54-REVERSE]  75.01,468.23 180 top
J255  CONNECTOR-HEADER-2X2P2X2P-2.54-REVERSE  [2X2P-2.54-REVERSE]  45.02,468.23 180 top
J256  CONNECTOR-HEADER-2X2P2X2P-2.54-REVERSE  [2X2P-2.54-REVERSE]  15,468.23 180 top
JP1  M12PTH  [1X12-SMALL-PADS]  419.74,5 90 top
JP2  M12PTH  [1X12-SMALL-PADS]  450.72,5 90 top
JP3  M12PTH  [1X12-SMALL-PADS]  426.12,5 90 top
JP4  M12PTH  [1X12-SMALL-PADS]  443.92,5 90 top
JP5  [2X04]  472.36,92.96 0 top
ONLINE/OFFLINE  SWITCH-2P3T-SK12D07VG3  [SWITCH-2P3T-SK12D07VG3]  394.67,4.95 0 top
Q2  FDD6637  [TO252]  119.48,362.53 270 top
Q3  FDD6637  [TO252]  119.38,301.22 270 top
Q6  FDD6637  [TO252]  119.33,183.31 270 top
Q8  FDD6637  [TO252]  118.97,91.11 270 top
R3  0.33  [RESISTOR-3W-20MM]  22.63,362.58 180 bottom
R7  0.33  [RESISTOR-3W-20MM]  19.99,308.64 180 bottom
R14  0.33  [RESISTOR-3W-20MM]  22.28,188.9 180 bottom
R27  0.33  [RESISTOR-3W-20MM]  23.14,92.28 180 bottom
R28  0.33  [RESISTOR-3W-20MM]  22.61,356.13 180 bottom
R29  0.33  [RESISTOR-3W-20MM]  22.61,368.96 180 bottom
R30  0.33  [RESISTOR-3W-20MM]  19.91,302.01 180 bottom
R31  0.33  [RESISTOR-3W-20MM]  19.89,295.76 180 bottom
R32  0.33  [RESISTOR-3W-20MM]  22.38,182.35 180 bottom
R33  0.33  [RESISTOR-3W-20MM]  22.38,175.97 180 bottom
R34  0.33  [RESISTOR-3W-20MM]  22.96,85.95 180 bottom
R35  0.33  [RESISTOR-3W-20MM]  23.16,98.63 180 bottom
TER_CONN  TERMINAL_CONN  [TERMINALCONNECTOR_15MM]  179.32,58.19 0 bottom
U$1  L3D-LOGOL3DCUBE-LOGO-0.8X2.5  [L3DCUBE-LOGO-0.8X2.5]  452.63,453.59 0 bottom
U$2  FIDUCIAL-MARK  [FIDUCIAL-MARK]  467.94,2.79 0 top
U$3  FIDUCIAL-MARK  [FIDUCIAL-MARK]  14.76,476 0 top
U$4  BEAGLEBONE_OUTLINE  [BEAGLEBONE_SHIELD]  242.14,0.13 0 top
U$5  CUBE-16-DAUGHTERBOARD-SOLDERPAD  [CUBE-16-DAUGHTERBOARD-PAD]  430.5,63.2 180 bottom
U$6  CONNECTOR-1X2P-POWER-PAD  [1X2P-POWER-PAD]  113.23,10.26 270 bottom
U$7  CUBE-16-DAUGHTERBOARD-CURRENT-LMTPAD  [CUBE-16-DAUGHTERBOARD-CURRENT-LMT-PAD]  50.88,92.08 180 bottom
U$8  CUBE-16-DAUGHTERBOARD-CURRENT-LMTPAD  [CUBE-16-DAUGHTERBOARD-CURRENT-LMT-PAD]  61.24,183.39 180 bottom
U$9  CUBE-16-DAUGHTERBOARD-CURRENT-LMTPAD  [CUBE-16-DAUGHTERBOARD-CURRENT-LMT-PAD]  60.53,300.91 180 bottom
U$10  CUBE-16-DAUGHTERBOARD-CURRENT-LMTPAD  [CUBE-16-DAUGHTERBOARD-CURRENT-LMT-PAD]  60.5,362.97 180 bottom

## Library data of the parts
C1-C4 C21 J1-J256 ONLINE/OFFLINE R3 R7 R14 R27-R35 TER_CONN U$1-U$3 U$5-U$10 = OPL Eagle Library
GOLD_ORB_SM1 = NBitWonder
JP1-JP4 = Spark
JP5 U$4 = adafruit
Q2 Q3 Q6 Q8 = transistor-fet

## Nets
!RST: JP2.2 JP4.2 U$5.RST
+3V3: JP2.1 JP2.3 JP4.1 JP4.3 U$4.49 U$4.50 U$5.3V3 U$5.3V3'
+5V: C21.+ JP1.1 JP3.1 R3.1 R7.1 R14.1 R27.1 R28.1 R29.1 R30.1 R31.1 R32.1 R33.1 R34.1 R35.1 U$4.51 U$4.52 U$5.5V U$5.5V' U$6.VCC U$7.VCC U$8.VCC U$9.VCC U$10.VCC
A2: JP1.10 JP3.10 U$4.43 U$5.IN4
A3: JP1.9 JP3.9 U$4.39 U$5.IN5
A4: JP1.8 JP3.8 U$4.44 U$5.IN6
A5: JP1.7 JP3.7 U$4.40 U$5.IN7
D0: JP2.12 JP4.12 U$4.45 U$5.IN0
D1: JP2.11 JP4.11 U$4.41 U$5.IN1
D2: JP2.10 JP4.10 U$4.46 U$5.IN2
D3: JP2.9 JP4.9 U$4.42 U$5.IN3
D7: JP2.5 JP4.5
DIN_1: J1.2 U$5.OUT0
DIN_2: J33.2 JP5.2 U$5.OUT1
DIN_3: J65.2 U$5.OUT2
DIN_4: J97.2 JP5.4 U$5.OUT3
DIN_5: J129.2 U$5.OUT4
DIN_6: J161.2 JP5.6 U$5.OUT5
DIN_7: J193.2 U$5.OUT6
DIN_8: J225.2 JP5.8 U$5.OUT7
DOUT_1: J32.3 JP5.1
DOUT_3: J96.3 JP5.3
DOUT_5: J160.3 JP5.5
DOUT_7: J224.3 JP5.7
GAIN-CTR: JP2.7 JP4.7 U$4.83 U$5.GAIN-CTR
GND: C1.- C2.- C3.- C4.- C21.- J1.4 J2.4 J3.4 J4.4 J5.4 J6.4 J7.4 J8.4 J9.4 J10.4 J11.4 J12.4 J13.4 J14.4 J15.4 J16.4 J17.4 J18.4 J19.4 J20.4 J21.4 J22.4 J23.4 J24.4 J25.4 J26.4 J27.4 J28.4 J29.4 J30.4 J31.4 J32.4 J33.4 J34.4 J35.4 J36.4 J37.4 J38.4 J39.4 J40.4 J41.4 J42.4 J43.4 J44.4 J45.4 J46.4 J47.4 J48.4 J49.4 J50.4 J51.4 J52.4 J53.4 J54.4 J55.4 J56.4 J57.4 J58.4 J59.4 J60.4 J61.4 J62.4 J63.4 J64.4 J65.4 J66.4 J67.4 J68.4 J69.4 J70.4 J71.4 J72.4 J73.4 J74.4 J75.4 J76.4 J77.4 J78.4 J79.4 J80.4 J81.4 J82.4 J83.4 J84.4 J85.4 J86.4 J87.4 J88.4 J89.4 J90.4 J91.4 J92.4 J93.4 J94.4 J95.4 J96.4 J97.4 J98.4 J99.4 J100.4 J101.4 J102.4 J103.4 J104.4 J105.4 J106.4 J107.4 J108.4 J109.4 J110.4 J111.4 J112.4 J113.4 J114.4 J115.4 J116.4 J117.4 J118.4 J119.4 J120.4 J121.4 J122.4 J123.4 J124.4 J125.4 J126.4 J127.4 J128.4 J129.4 J130.4 J131.4 J132.4 J133.4 J134.4 J135.4 J136.4 J137.4 J138.4 J139.4 J140.4 J141.4 J142.4 J143.4 J144.4 J145.4 J146.4 J147.4 J148.4 J149.4 J150.4 J151.4 J152.4 J153.4 J154.4 J155.4 J156.4 J157.4 J158.4 J159.4 J160.4 J161.4 J162.4 J163.4 J164.4 J165.4 J166.4 J167.4 J168.4 J169.4 J170.4 J171.4 J172.4 J173.4 J174.4 J175.4 J176.4 J177.4 J178.4 J179.4 J180.4 J181.4 J182.4 J183.4 J184.4 J185.4 J186.4 J187.4 J188.4 J189.4 J190.4 J191.4 J192.4 J193.4 J194.4 J195.4 J196.4 J197.4 J198.4 J199.4 J200.4 J201.4 J202.4 J203.4 J204.4 J205.4 J206.4 J207.4 J208.4 J209.4 J210.4 J211.4 J212.4 J213.4 J214.4 J215.4 J216.4 J217.4 J218.4 J219.4 J220.4 J221.4 J222.4 J223.4 J224.4 J225.4 J226.4 J227.4 J228.4 J229.4 J230.4 J231.4 J232.4 J233.4 J234.4 J235.4 J236.4 J237.4 J238.4 J239.4 J240.4 J241.4 J242.4 J243.4 J244.4 J245.4 J246.4 J247.4 J248.4 J249.4 J250.4 J251.4 J252.4 J253.4 J254.4 J255.4 J256.4 JP1.2 JP2.4 JP3.2 JP4.4 ONLINE/OFFLINE.3 TER_CONN.2_1 TER_CONN.2_2 TER_CONN.2_3 TER_CONN.2_4 U$4.1 U$4.2 U$4.47 U$4.48 U$4.89 U$4.90 U$4.91 U$4.92 U$5.P$1 U$5.P$2 U$5.P$3 U$5.P$4 U$5.P$5 U$5.P$6 U$5.P$8 U$5.P$27 U$5.P$30 U$5.P$31 U$5.P$32 U$5.P$33 U$5.P$44 U$5.P$45 U$5.P$46 U$5.P$47 U$5.P$48 U$6.GND U$7.GND U$7.GND1 U$7.GND2 U$8.GND U$8.GND1 U$8.GND2 U$9.GND U$9.GND1 U$9.GND2 U$10.GND U$10.GND1 U$10.GND2
MODE: JP2.8 JP4.8 U$5.MODE
N$1: J1.3 J2.2
N$2: J2.3 J3.2
N$3: J3.3 J4.2
N$4: J5.3 J6.2
N$5: J6.3 J7.2
N$6: J7.3 J8.2
N$7: J4.3 J5.2
N$8: J9.3 J10.2
N$9: J10.3 J11.2
N$10: J11.3 J12.2
N$11: J13.3 J14.2
N$12: J14.3 J15.2
N$13: J15.3 J16.2
N$14: J12.3 J13.2
N$15: J17.3 J18.2
N$16: J18.3 J19.2
N$17: J19.3 J20.2
N$18: J21.3 J22.2
N$19: J22.3 J23.2
N$20: J23.3 J24.2
N$21: J20.3 J21.2
N$22: J25.3 J26.2
N$23: J26.3 J27.2
N$24: J27.3 J28.2
N$25: J29.3 J30.2
N$26: J30.3 J31.2
N$27: J31.3 J32.2
N$28: J28.3 J29.2
N$29: J8.3 J9.2
N$30: J16.3 J17.2
N$31: J24.3 J25.2
N$32: J65.3 J66.2
N$33: J33.3 J34.2
N$34: J34.3 J35.2
N$35: J35.3 J36.2
N$36: J37.3 J38.2
N$37: J38.3 J39.2
N$38: J39.3 J40.2
N$39: J36.3 J37.2
N$40: J41.3 J42.2
N$41: J42.3 J43.2
N$42: J43.3 J44.2
N$43: J45.3 J46.2
N$44: J46.3 J47.2
N$45: J47.3 J48.2
N$46: J44.3 J45.2
N$47: J49.3 J50.2
N$48: J50.3 J51.2
N$49: J51.3 J52.2
N$50: J53.3 J54.2
N$51: J54.3 J55.2
N$52: J55.3 J56.2
N$53: J52.3 J53.2
N$54: J57.3 J58.2
N$55: J58.3 J59.2
N$56: J59.3 J60.2
N$57: J61.3 J62.2
N$58: J62.3 J63.2
N$59: J63.3 J64.2
N$60: J60.3 J61.2
N$61: J40.3 J41.2
N$62: J48.3 J49.2
N$63: J56.3 J57.2
N$64: Q2.2 R3.2 R28.2 R29.2 U$10.V-DROP
N$65: J66.3 J67.2
N$66: J67.3 J68.2
N$67: J69.3 J70.2
N$68: J70.3 J71.2
N$69: J71.3 J72.2
N$70: J68.3 J69.2
N$71: J73.3 J74.2
N$72: J74.3 J75.2
N$73: J75.3 J76.2
N$74: J77.3 J78.2
N$75: J78.3 J79.2
N$76: J79.3 J80.2
N$77: J76.3 J77.2
N$78: J81.3 J82.2
N$79: J82.3 J83.2
N$80: J83.3 J84.2
N$81: J85.3 J86.2
N$82: J86.3 J87.2
N$83: J87.3 J88.2
N$84: J84.3 J85.2
N$85: J89.3 J90.2
N$86: J90.3 J91.2
N$87: J91.3 J92.2
N$88: J93.3 J94.2
N$89: J94.3 J95.2
N$90: J95.3 J96.2
N$91: J92.3 J93.2
N$92: J72.3 J73.2
N$93: J80.3 J81.2
N$94: J88.3 J89.2
N$95: J97.3 J98.2
N$96: J98.3 J99.2
N$97: J99.3 J100.2
N$98: J101.3 J102.2
N$99: J102.3 J103.2
N$100: J103.3 J104.2
N$101: J100.3 J101.2
N$102: J105.3 J106.2
N$103: J106.3 J107.2
N$104: J107.3 J108.2
N$105: J109.3 J110.2
N$106: J110.3 J111.2
N$107: J111.3 J112.2
N$108: J108.3 J109.2
N$109: J113.3 J114.2
N$110: J114.3 J115.2
N$111: J115.3 J116.2
N$112: J117.3 J118.2
N$113: J118.3 J119.2
N$114: J119.3 J120.2
N$115: J116.3 J117.2
N$116: J121.3 J122.2
N$117: J122.3 J123.2
N$118: J123.3 J124.2
N$119: J125.3 J126.2
N$120: J126.3 J127.2
N$121: J127.3 J128.2
N$122: J124.3 J125.2
N$123: J104.3 J105.2
N$124: J112.3 J113.2
N$125: J120.3 J121.2
N$126: Q2.1 U$10.G
N$127: J129.3 J130.2
N$128: J130.3 J131.2
N$129: J131.3 J132.2
N$130: J133.3 J134.2
N$131: J134.3 J135.2
N$132: J135.3 J136.2
N$133: J132.3 J133.2
N$134: J137.3 J138.2
N$135: J138.3 J139.2
N$136: J139.3 J140.2
N$137: J141.3 J142.2
N$138: J142.3 J143.2
N$139: J143.3 J144.2
N$140: J140.3 J141.2
N$141: J145.3 J146.2
N$142: J146.3 J147.2
N$143: J147.3 J148.2
N$144: J149.3 J150.2
N$145: J150.3 J151.2
N$146: J151.3 J152.2
N$147: J148.3 J149.2
N$148: J153.3 J154.2
N$149: J154.3 J155.2
N$150: J155.3 J156.2
N$151: J157.3 J158.2
N$152: J158.3 J159.2
N$153: J159.3 J160.2
N$154: J156.3 J157.2
N$155: J136.3 J137.2
N$156: J144.3 J145.2
N$157: J152.3 J153.2
N$158: J161.3 J162.2
N$159: J162.3 J163.2
N$160: J163.3 J164.2
N$161: J165.3 J166.2
N$162: J166.3 J167.2
N$163: J167.3 J168.2
N$164: J164.3 J165.2
N$165: J169.3 J170.2
N$166: J170.3 J171.2
N$167: J171.3 J172.2
N$168: J173.3 J174.2
N$169: J174.3 J175.2
N$170: J175.3 J176.2
N$171: J172.3 J173.2
N$172: J177.3 J178.2
N$173: J178.3 J179.2
N$174: J179.3 J180.2
N$175: J181.3 J182.2
N$176: J182.3 J183.2
N$177: J183.3 J184.2
N$178: J180.3 J181.2
N$179: J185.3 J186.2
N$180: J186.3 J187.2
N$181: J187.3 J188.2
N$182: J189.3 J190.2
N$183: J190.3 J191.2
N$184: J191.3 J192.2
N$185: J188.3 J189.2
N$186: J168.3 J169.2
N$187: J176.3 J177.2
N$188: J184.3 J185.2
N$189: Q3.2 R7.2 R30.2 R31.2 U$9.V-DROP
N$190: J193.3 J194.2
N$191: J194.3 J195.2
N$192: J195.3 J196.2
N$193: J197.3 J198.2
N$194: J198.3 J199.2
N$195: J199.3 J200.2
N$196: J196.3 J197.2
N$197: J201.3 J202.2
N$198: J202.3 J203.2
N$199: J203.3 J204.2
N$200: J205.3 J206.2
N$201: J206.3 J207.2
N$202: J207.3 J208.2
N$203: J204.3 J205.2
N$204: J209.3 J210.2
N$205: J210.3 J211.2
N$206: J211.3 J212.2
N$207: J213.3 J214.2
N$208: J214.3 J215.2
N$209: J215.3 J216.2
N$210: J212.3 J213.2
N$211: J217.3 J218.2
N$212: J218.3 J219.2
N$213: J219.3 J220.2
N$214: J221.3 J222.2
N$215: J222.3 J223.2
N$216: J223.3 J224.2
N$217: J220.3 J221.2
N$218: J200.3 J201.2
N$219: J208.3 J209.2
N$220: J216.3 J217.2
N$221: J225.3 J226.2
N$222: J226.3 J227.2
N$223: J227.3 J228.2
N$224: J229.3 J230.2
N$225: J230.3 J231.2
N$226: J231.3 J232.2
N$227: J228.3 J229.2
N$228: J233.3 J234.2
N$229: J234.3 J235.2
N$230: J235.3 J236.2
N$231: J237.3 J238.2
N$232: J238.3 J239.2
N$233: J239.3 J240.2
N$234: J236.3 J237.2
N$235: J241.3 J242.2
N$236: J242.3 J243.2
N$237: J243.3 J244.2
N$238: J245.3 J246.2
N$239: J246.3 J247.2
N$240: J247.3 J248.2
N$241: J244.3 J245.2
N$242: J249.3 J250.2
N$243: J250.3 J251.2
N$244: J251.3 J252.2
N$245: J253.3 J254.2
N$246: J254.3 J255.2
N$247: J255.3 J256.2
N$248: J252.3 J253.2
N$249: J232.3 J233.2
N$250: J240.3 J241.2
N$251: J248.3 J249.2
N$252: Q3.1 U$9.G
N$253: Q8.1 U$7.G
N$254: Q6.1 U$8.G
N$265: Q6.2 R14.2 R32.2 R33.2 U$8.V-DROP
N$267: Q8.2 R27.2 R34.2 R35.2 U$7.V-DROP
RX: JP1.4 JP3.4
SOUND: JP1.5 JP3.5 U$4.85 U$5.SOUND
STREAMING: JP2.6 JP4.6 ONLINE/OFFLINE.2 U$5.STEAMING
SYS_5V: U$4.53
TX: JP1.3 JP3.3
V+: C1.+ C2.+ C3.+ C4.+ J1.1 J2.1 J3.1 J4.1 J5.1 J6.1 J7.1 J8.1 J9.1 J10.1 J11.1 J12.1 J13.1 J14.1 J15.1 J16.1 J17.1 J18.1 J19.1 J20.1 J21.1 J22.1 J23.1 J24.1 J25.1 J26.1 J27.1 J28.1 J29.1 J30.1 J31.1 J32.1 J33.1 J34.1 J35.1 J36.1 J37.1 J38.1 J39.1 J40.1 J41.1 J42.1 J43.1 J44.1 J45.1 J46.1 J47.1 J48.1 J49.1 J50.1 J51.1 J52.1 J53.1 J54.1 J55.1 J56.1 J57.1 J58.1 J59.1 J60.1 J61.1 J62.1 J63.1 J64.1 J65.1 J66.1 J67.1 J68.1 J69.1 J70.1 J71.1 J72.1 J73.1 J74.1 J75.1 J76.1 J77.1 J78.1 J79.1 J80.1 J81.1 J82.1 J83.1 J84.1 J85.1 J86.1 J87.1 J88.1 J89.1 J90.1 J91.1 J92.1 J93.1 J94.1 J95.1 J96.1 J97.1 J98.1 J99.1 J100.1 J101.1 J102.1 J103.1 J104.1 J105.1 J106.1 J107.1 J108.1 J109.1 J110.1 J111.1 J112.1 J113.1 J114.1 J115.1 J116.1 J117.1 J118.1 J119.1 J120.1 J121.1 J122.1 J123.1 J124.1 J125.1 J126.1 J127.1 J128.1 J129.1 J130.1 J131.1 J132.1 J133.1 J134.1 J135.1 J136.1 J137.1 J138.1 J139.1 J140.1 J141.1 J142.1 J143.1 J144.1 J145.1 J146.1 J147.1 J148.1 J149.1 J150.1 J151.1 J152.1 J153.1 J154.1 J155.1 J156.1 J157.1 J158.1 J159.1 J160.1 J161.1 J162.1 J163.1 J164.1 J165.1 J166.1 J167.1 J168.1 J169.1 J170.1 J171.1 J172.1 J173.1 J174.1 J175.1 J176.1 J177.1 J178.1 J179.1 J180.1 J181.1 J182.1 J183.1 J184.1 J185.1 J186.1 J187.1 J188.1 J189.1 J190.1 J191.1 J192.1 J193.1 J194.1 J195.1 J196.1 J197.1 J198.1 J199.1 J200.1 J201.1 J202.1 J203.1 J204.1 J205.1 J206.1 J207.1 J208.1 J209.1 J210.1 J211.1 J212.1 J213.1 J214.1 J215.1 J216.1 J217.1 J218.1 J219.1 J220.1 J221.1 J222.1 J223.1 J224.1 J225.1 J226.1 J227.1 J228.1 J229.1 J230.1 J231.1 J232.1 J233.1 J234.1 J235.1 J236.1 J237.1 J238.1 J239.1 J240.1 J241.1 J242.1 J243.1 J244.1 J245.1 J246.1 J247.1 J248.1 J249.1 J250.1 J251.1 J252.1 J253.1 J254.1 J255.1 J256.1 Q2.3 Q3.3 Q6.3 Q8.3 TER_CONN.1_1 TER_CONN.1_2 TER_CONN.1_3 TER_CONN.1_4
XOUT: JP1.12 JP3.12 U$4.86 U$5.XOUT
YOUT: JP1.11 JP3.11 U$4.84 U$5.YOUT
ZOUT: JP1.6 JP3.6 U$4.82 U$5.ZOUT